# Altium PCB EB2_Cyclone_1_03.PcbDoc (part 3 of 4)
Units mm, origin at the board's own origin, x right, y up, seen from the top; angles counter-clockwise.
Board outline 165.1 x 115.01 mm, 6 copper layers (Top Layer, MidLayer1, VCC Plane, GND Plane, MidLayer2, Bottom Layer); 336 components, 379 nets, 1581 pads, 731 vias.
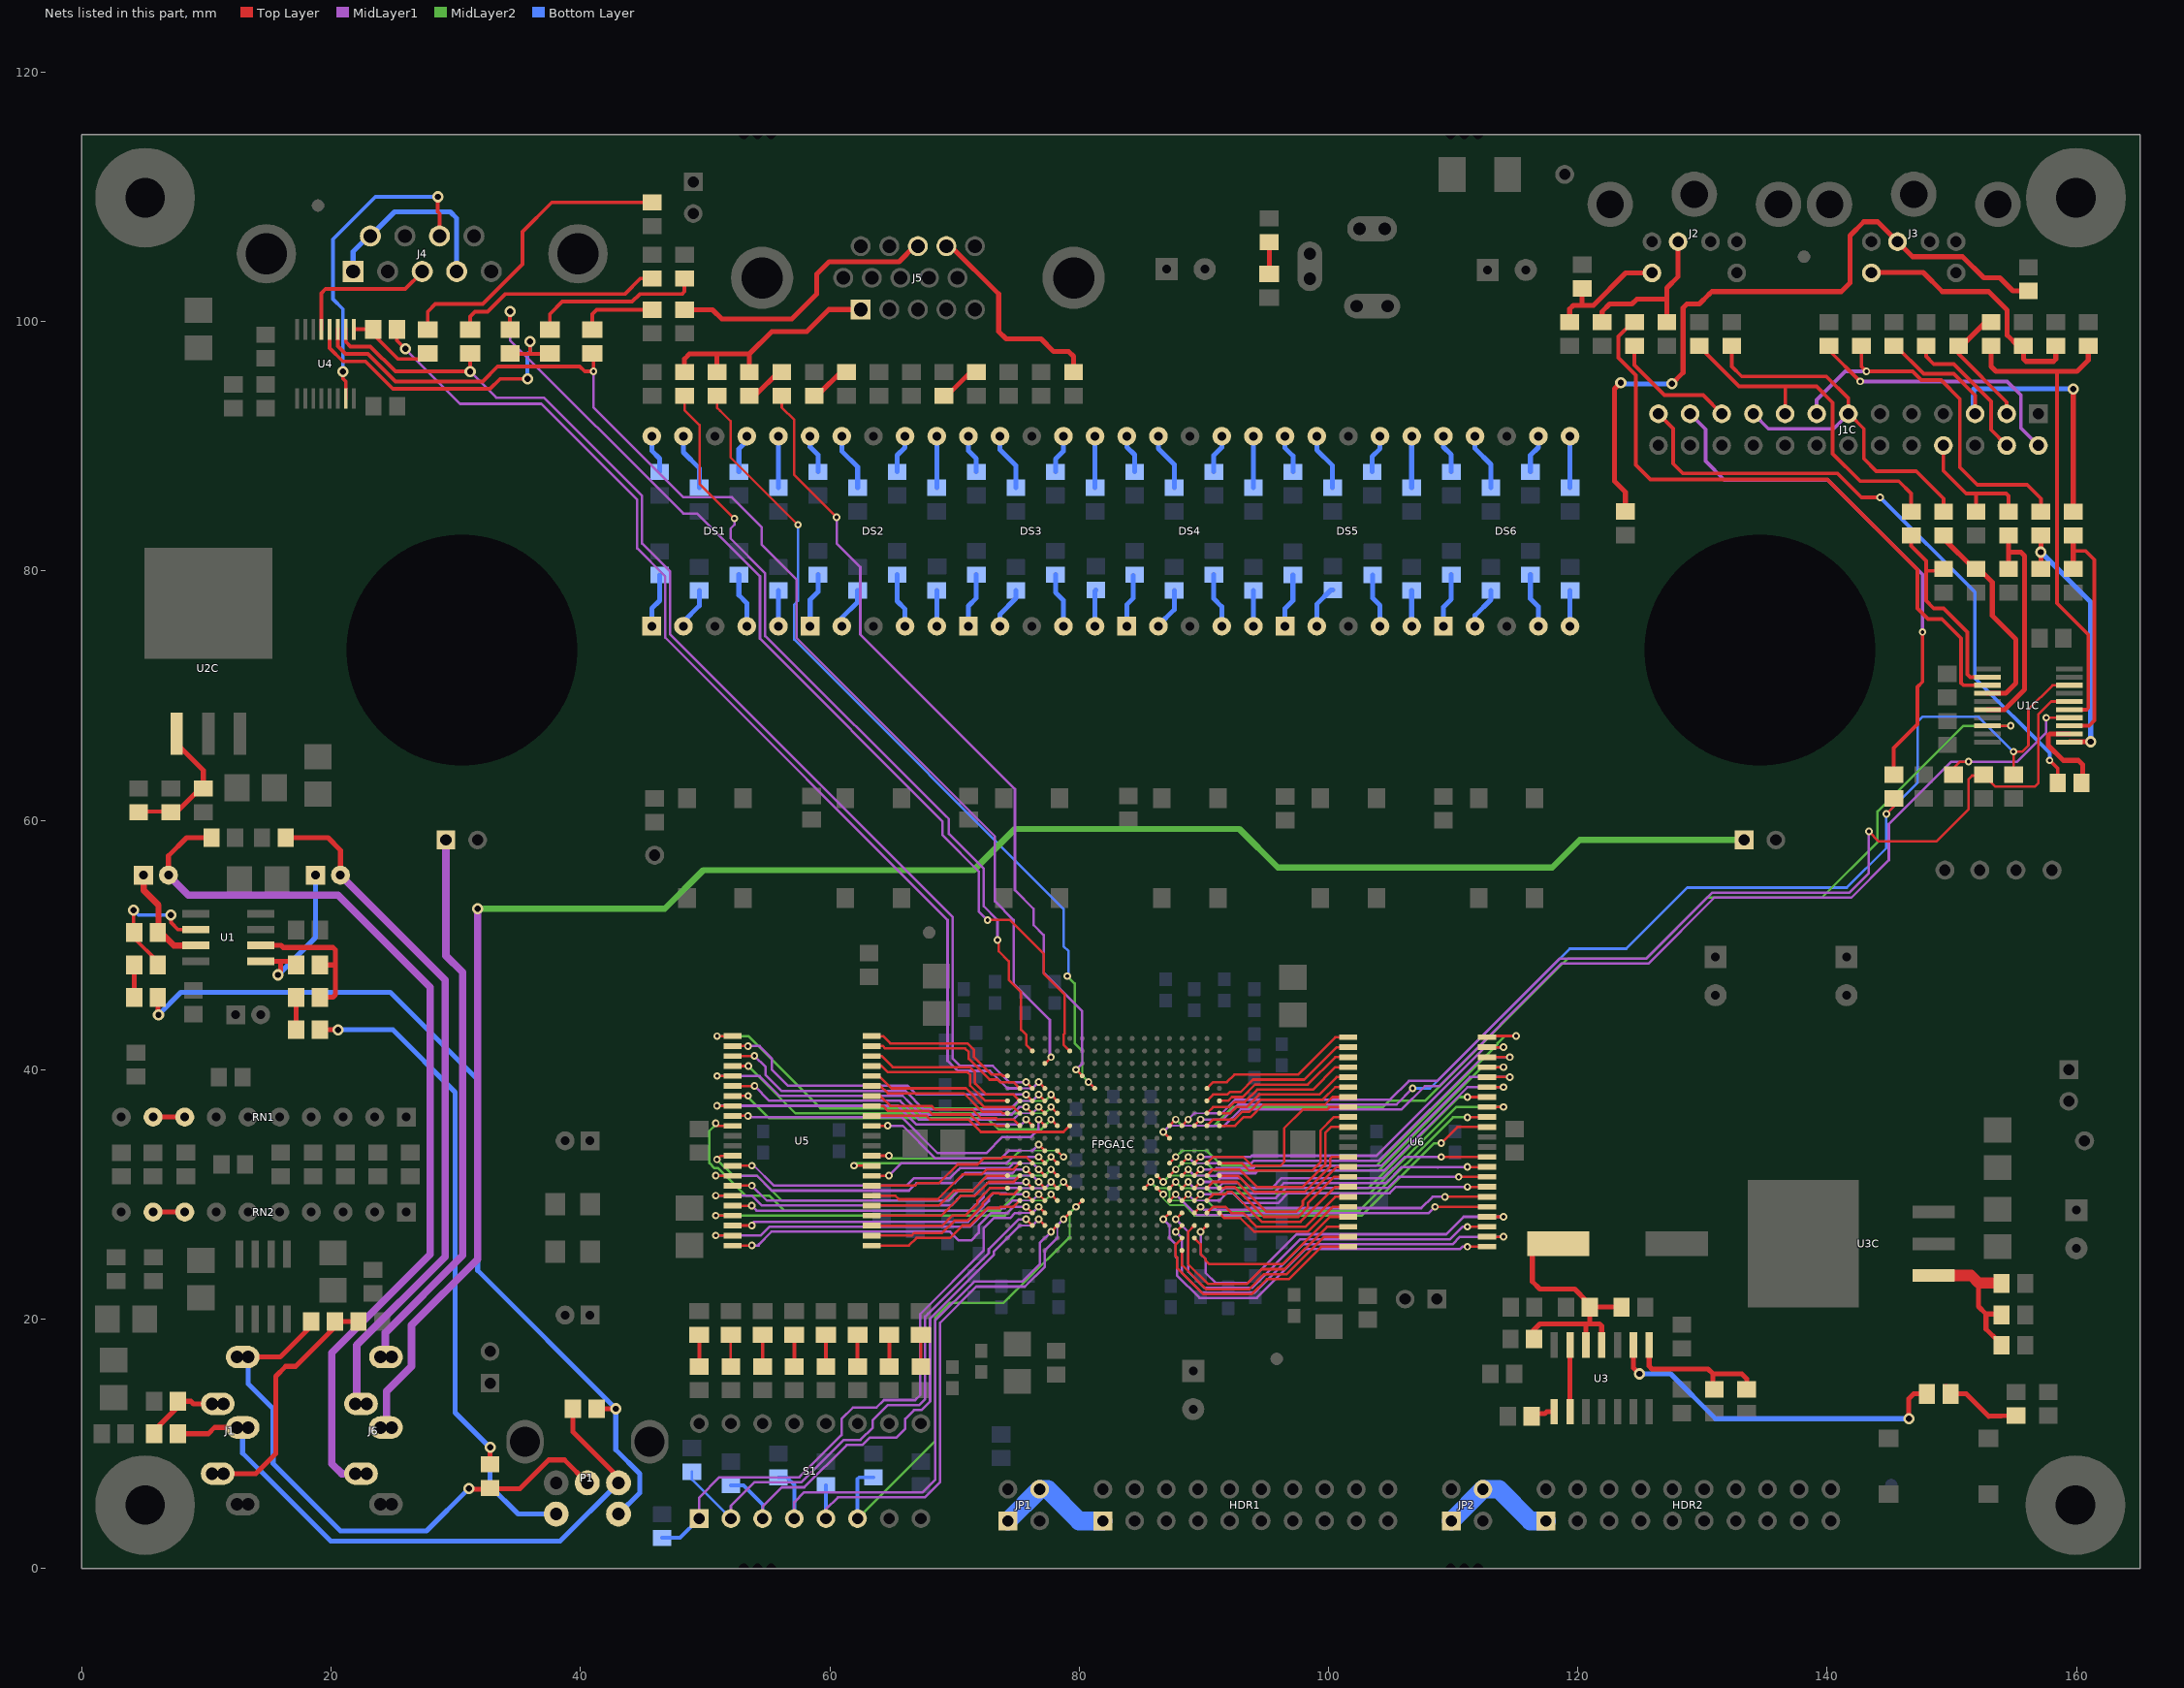
[diagram p7: the nets of this part, all layers, seen from the top]

## Via types
v1: diameter 0.6, hole 0.3, Top Layer to Bottom Layer, tented both sides, 433 vias
v2: diameter 1.6, hole 1, Top Layer to Bottom Layer, 191 vias
v3: diameter 0.9, hole 0.5, Top Layer to Bottom Layer, tented both sides, 105 vias
v4: diameter 1.27, hole 0.7, Top Layer to Bottom Layer, tented both sides, 2 vias

## Nets (pads, with @x,y where several pads share a name; then routed paths per layer and width w, separated by ;. In a path a pad name is that pad's centre, name@x,y a point inside that pad or via, vN(x,y) a via of type N, cw(c..) or ccw(c..) an arc to the next point about the centre after c; other vN are vias at no path point) (continued)
NetC32_2: C32.2 CR1.1 L1.1 R112.1 U3.4 U3.5 | length 23.5
  Top Layer w0.4: L1.1@116.42,18.6 116.42,19.07 116.95,19.6 120.55,19.6 ; CR1.1@118.35,26 116.35,26 116.35,23 116.95,22.4 119.75,22.4 C32.2@120.75,21.4 ; U3.5@120.65,17.915 120.65,19.5 120.55,19.6 ; C32.2@120.95,21 120.95,20.955 120.95,19.6 ; C32.2@120.965,20.955 R112.1@123.51,20.955 ; U3.4@121.92,17.915 121.92,19.43 121.75,19.6 120.95,19.6 ; 120.55,19.6 120.95,19.6
NetC33_1: C33.1 P1.2 R115.2 | length 53.3
  Top Layer w0.4: C33.1@19.1,43.2 v3(20.55,43.2) ; R115.2@32.75,8.3 R115.2@32.75,8.35 v3(32.75,9.7)
  Bottom Layer w0.4: v3(20.55,43.2) 24.95,43.2 29.95,38.2 29.95,12.5 v3(32.75,9.7) 32.75,6.6 34.99,4.36 P1.2@38.05,4.36
NetC33_2: C33.2 R116.1 | length 2.6
  Top Layer w0.4: C33.2@17.2,43.2 R116.1@17.2,45.8
NetC35_1: C35.1 P1.5 R114.2 | length 73.1
  Top Layer w0.4: C35.1@6.1,45.8 6.1,44.45 v3(6.15,44.4) ; R114.2@41.3,12.8 v3(42.85,12.8)
  Bottom Layer w0.4: v3(6.15,44.4) 7.95,46.2 24.75,46.2 31.75,39.2 31.75,23.9 42.84,12.81 42.84,12.8 42.84,9.51 44.75,7.6 44.75,6.06 P1.5@43.05,4.36
NetC35_2: C35.2 R117.1 | length 2.6
  Top Layer w0.4: C35.2@4.2,45.8 R117.1@4.2,48.4
NetC36_1: C36.1 R118.2 U1.1 | length 13.5
  Top Layer w0.4: U1.1@14.35,48.695 15.95,48.695 ; v3(15.75,47.6) 15.95,47.8 15.95,48.695 ; R118.2@17.35,48.6 17.255,48.695 17.2,48.695 15.95,48.695
  Bottom Layer w0.4: v3(15.75,47.6) 18.75,50.6 C36.1@18.75,55.6
NetC36_2: C36.2 J6.4 J6.4A J6.4B R120.2 | length 56.7
  Top Layer w0.4: R120.2@16.35,58.6 19.75,58.6 20.75,57.6 C36.2@20.75,55.6
  MidLayer1 w0.6: C36.2@20.75,55.6 29.15,47.2 29.15,25 22.05,17.9 22.05,13.3 J6.4@22.15,13.2 ; J6.4B@21.95,13.2 J6.4@22.15,13.2 ; J6.4@22.75,13.3 J6.4@22.65,13.2 ; J6.4A@22.85,13.2 J6.4@22.65,13.2 ; J6.4@22.15,13.2 J6.4@22.4,13.2 J6.4@22.65,13.2
NetC38_1: C38.1 R119.2 U1.7 | length 8.4
  Top Layer w0.5: C38.1@4.95,55.6 4.95,54.4 6.15,53.2 6.15,51.2 6.225,51.125 7.385,49.965 U1.7@9.15,49.965
NetC38_2: C38.2 J6.2 J6.2A J6.2B R121.2 | length 74.9
  Top Layer w0.4: C38.2@6.95,55.6 6.95,57.15 8.4,58.6 R121.2@10.4,58.6
  MidLayer1 w0.6: C38.2@6.95,55.6 8.55,54 20.55,54 27.95,46.6 27.95,25.2 20.05,17.3 20.05,8.4 20.85,7.6 J6.2B@21.95,7.6 J6.2@22.4,7.6 J6.2A@22.85,7.6
NetDS1_1: DS1.1 R41.1 | length 4.4
  Bottom Layer w0.4: DS1.1@45.72,75.565 45.72,76.99 46.35,77.62 R41.1@46.35,79.67
NetDS1_2: DS1.2 R37.1 | length 3.4
  Bottom Layer w0.4: DS1.2@48.26,75.565 48.26,75.93 49.53,77.2 R37.1@49.53,78.425
NetDS1_4: DS1.4 R33.1 | length 4.4
  Bottom Layer w0.4: R33.1@52.705,79.695 52.705,78.065 53.34,77.43 DS1.4@53.34,75.565
NetDS1_5: DS1.5 R53.1 | length 2.9
  Bottom Layer w0.4: DS1.5@55.88,75.565 R53.1@55.88,78.425
NetDS1_6: DS1.6 R29.1 | length 4.1
  Bottom Layer w0.4: R29.1@55.88,86.675 DS1.6@55.88,90.805
NetDS1_7: DS1.7 R25.1 | length 3.1
  Bottom Layer w0.4: R25.1@52.705,87.945 52.705,89.775 53.34,90.41 DS1.7@53.34,90.805
NetDS1_9: DS1.9 R45.1 | length 4.7
  Bottom Layer w0.4: DS1.9@48.26,90.805 48.26,89.51 49.53,88.24 R45.1@49.53,86.675
NetDS1_10: DS1.10 R49.1 | length 3.1
  Bottom Layer w0.4: DS1.10@45.72,90.805 45.72,89.65 46.355,89.015 R49.1@46.355,87.945
NetDS2_1: DS2.1 R42.1 | length 4.4
  Bottom Layer w0.4: DS2.1@58.42,75.565 58.42,77.69 59.055,78.325 R42.1@59.055,79.695
NetDS2_2: DS2.2 R38.1 | length 3.4
  Bottom Layer w0.4: DS2.2@60.96,75.565 60.96,76.23 62.23,77.5 R38.1@62.23,78.425
NetDS2_4: DS2.4 R34.1 | length 4.4
  Bottom Layer w0.4: R34.1@65.405,79.695 65.405,77.565 66.04,76.93 DS2.4@66.04,75.565
NetDS2_5: DS2.5 R54.1 | length 2.9
  Bottom Layer w0.4: DS2.5@68.58,75.565 R54.1@68.58,78.425
NetDS2_6: DS2.6 R30.1 | length 4.1
  Bottom Layer w0.4: R30.1@68.58,86.675 DS2.6@68.58,90.805
NetDS2_7: DS2.7 R26.1 | length 3.1
  Bottom Layer w0.4: R26.1@65.405,87.945 65.405,89.275 66.04,89.91 DS2.7@66.04,90.805
NetDS2_9: DS2.9 R46.1 | length 4.7
  Bottom Layer w0.4: DS2.9@60.96,90.805 60.96,89.61 62.23,88.34 R46.1@62.23,86.675
NetDS2_10: DS2.10 R50.1 | length 3.1
  Bottom Layer w0.4: DS2.10@58.42,90.805 58.42,89.95 59.055,89.315 R50.1@59.055,87.945
NetDS3_1: DS3.1 R43.1 | length 4.4
  Bottom Layer w0.4: DS3.1@71.12,75.565 71.12,77.19 71.755,77.825 R43.1@71.755,79.695
NetDS3_2: DS3.2 R39.1 | length 3.4
  Bottom Layer w0.4: DS3.2@73.66,75.565 73.66,76.53 74.93,77.8 R39.1@74.93,78.425
NetDS3_4: DS3.4 R35.1 | length 4.4
  Bottom Layer w0.4: R35.1@78.105,79.695 78.105,78.265 78.74,77.63 DS3.4@78.74,75.565
NetDS3_5: DS3.5 R55.1 | length 2.9
  Bottom Layer w0.4: DS3.5@81.28,75.565 81.28,78.4 R55.1@81.35,78.47
NetDS3_6: DS3.6 R31.1 | length 4.1
  Bottom Layer w0.4: R31.1@81.28,86.675 DS3.6@81.28,90.805
NetDS3_7: DS3.7 R27.1 | length 3.1
  Bottom Layer w0.4: R27.1@78.105,87.945 78.105,88.975 78.74,89.61 DS3.7@78.74,90.805
NetDS3_9: DS3.9 R47.1 | length 4.7
  Bottom Layer w0.4: DS3.9@73.66,90.805 73.66,89.71 74.93,88.44 R47.1@74.93,86.675
NetDS3_10: DS3.10 R51.1 | length 3.1
  Bottom Layer w0.4: DS3.10@71.12,90.805 71.12,89.65 71.755,89.015 R51.1@71.755,87.945
NetDS4_1: DS4.1 R44.1 | length 4.3
  Bottom Layer w0.4: DS4.1@83.82,75.565 83.82,77.29 84.35,77.82 R44.1@84.35,79.62
NetDS4_2: DS4.2 R40.1 | length 3.4
  Bottom Layer w0.4: DS4.2@86.36,75.565 86.36,75.63 87.63,76.9 R40.1@87.63,78.425
NetDS4_4: DS4.4 R36.1 | length 4.4
  Bottom Layer w0.4: R36.1@90.805,79.695 90.805,77.765 91.44,77.13 DS4.4@91.44,75.565
NetDS4_5: DS4.5 R56.1 | length 2.9
  Bottom Layer w0.4: DS4.5@93.98,75.565 R56.1@93.98,78.425
NetDS4_6: DS4.6 R32.1 | length 4.1
  Bottom Layer w0.4: R32.1@93.98,86.675 DS4.6@93.98,90.805
NetDS4_7: DS4.7 R28.1 | length 3.1
  Bottom Layer w0.4: R28.1@90.805,87.945 90.805,89.275 91.44,89.91 DS4.7@91.44,90.805
NetDS4_9: DS4.9 R48.1 | length 4.7
  Bottom Layer w0.4: DS4.9@86.36,90.805 86.36,89.81 87.63,88.54 R48.1@87.63,86.675
NetDS4_10: DS4.10 R52.1 | length 3.1
  Bottom Layer w0.4: DS4.10@83.82,90.805 83.82,89.95 84.455,89.315 R52.1@84.455,87.945
NetDS5_1: DS5.1 R65.1 | length 4.4
  Bottom Layer w0.4: DS5.1@96.52,75.565 96.52,76.99 97.15,77.62 R65.1@97.15,79.67
NetDS5_2: DS5.2 R63.1 | length 3.5
  Bottom Layer w0.4: DS5.2@99.06,75.565 99.06,77.33 100.2,78.47 R63.1@100.35,78.47
NetDS5_4: DS5.4 R61.1 | length 4.4
  Bottom Layer w0.4: R61.1@103.54,79.675 103.54,77.83 104.14,77.23 DS5.4@104.14,75.565
NetDS5_5: DS5.5 R71.1 | length 2.9
  Bottom Layer w0.4: DS5.5@106.68,75.565 R71.1@106.68,78.425
NetDS5_6: DS5.6 R59.1 | length 4.1
  Bottom Layer w0.4: R59.1@106.68,86.675 DS5.6@106.68,90.805
NetDS5_7: DS5.7 R57.1 | length 3.1
  Bottom Layer w0.4: R57.1@103.505,87.945 103.505,89.175 104.14,89.81 DS5.7@104.14,90.805
NetDS5_9: DS5.9 R67.1 | length 4.7
  Bottom Layer w0.4: DS5.9@99.06,90.805 99.06,89.71 100.33,88.44 R67.1@100.33,86.675
NetDS5_10: DS5.10 R69.1 | length 3.1
  Bottom Layer w0.4: DS5.10@96.52,90.805 96.52,89.85 97.155,89.215 R69.1@97.155,87.945
NetDS6_1: DS6.1 R66.1 | length 4.4
  Bottom Layer w0.4: DS6.1@109.22,75.565 109.22,77.09 109.855,77.725 R66.1@109.855,79.695
NetDS6_2: DS6.2 R64.1 | length 3.4
  Bottom Layer w0.4: DS6.2@111.76,75.565 111.76,76.43 113.03,77.7 R64.1@113.03,78.425
NetDS6_4: DS6.4 R62.1 | length 4.4
  Bottom Layer w0.4: R62.1@116.205,79.695 116.205,77.765 116.84,77.13 DS6.4@116.84,75.565
NetDS6_5: DS6.5 R72.1 | length 2.9
  Bottom Layer w0.4: DS6.5@119.38,75.565 R72.1@119.38,78.425
NetDS6_6: DS6.6 R60.1 | length 4.1
  Bottom Layer w0.4: R60.1@119.38,86.675 DS6.6@119.38,90.805
NetDS6_7: DS6.7 R58.1 | length 3.1
  Bottom Layer w0.4: R58.1@116.205,87.945 116.205,89.275 116.84,89.91 DS6.7@116.84,90.805
NetDS6_9: DS6.9 R68.1 | length 4.7
  Bottom Layer w0.4: DS6.9@111.76,90.805 111.76,89.81 113.03,88.54 R68.1@113.03,86.675
NetDS6_10: DS6.10 R70.1 | length 3.1
  Bottom Layer w0.4: DS6.10@109.22,90.805 109.22,89.95 109.855,89.315 R70.1@109.855,87.945
NetJ1_2: J1.2 J1.2A J1.2B R3.2 R113.1 | length 19.8
  Top Layer w0.4: J1.2A@11.35,7.6 13.95,7.6 15.55,9.2 15.55,15.4 16.35,16.2 17.15,16.2 20.3,19.35 R113.1@20.3,19.8 R3.2@22.2,19.8
NetJ1_4: J1.4 J1.4A J1.4B R1.1 R2.2 | length 6.7
  Top Layer w0.4: R1.1@5.95,11.2 7.7,12.95 R2.2@7.7,13.4 8.75,13.4 8.95,13.2 J1.4B@10.45,13.2 J1.4@10.9,13.2 J1.4A@11.35,13.2
NetJ1C_2: J1C.2 R11C.2 R25C.2 | length 10
  Top Layer w0.3: R11C.2@150.55,98.05 150.55,97.4 154.41,93.54 J1C.2@154.41,92.6
  Top Layer w0.4: R11C.2@150.495,98.05 150.495,98.11 150.55,98.11 150.86,98.11 R25C.2@152.65,99.9
NetJ1C_3: J1C.3 R12C.2 R24C.2 | length 30
  Top Layer w0.3: R12C.2@145.35,98.05 145.5,98.05 147.75,95.8 150.15,95.8 151.87,94.08 J1C.3@151.87,92.6
  Top Layer w0.4: R12C.2@145.322,98.036 145.215,98.25 145.4,98.121 R12C.2@145.415,98.11 ; R24C.2@159.75,84.75 v3(159.75,94.6)
  Bottom Layer w0.4: J1C.3@151.67,92.6 151.67,92.608 151.75,94.6 v3(159.75,94.6)
NetJ1C_7: J1C.7 J1C.10 R14C.2 R22C.2 | length 35
  Top Layer w0.3: R14C.2@132.35,98.05 132.35,96.4 133.15,95.6 139.95,95.6 141.71,93.84 J1C.7@141.71,92.6 141.75,92.6 142.95,91.4 142.95,89 143.95,88 147.15,88 149.35,85.8 R22C.2@149.35,84.75
  Top Layer w0.4: R22C.2@149.35,84.6 R22C.2@149.35,84.75
  MidLayer1 w0.3: J1C.10@134.09,92.6 135.29,91.4 140.51,91.4 J1C.7@141.71,92.6
NetJ1C_8: J1C.8 R13C.2 R23C.2 | length 30.8
  Top Layer w0.3: J1C.8@139.17,92.52 J1C.8@139.17,92.6 ; R13C.2@142.75,98.05 142.75,96.4 v1(143.15,96) 146.843,96 147.543,95.3 149.15,95.3 150.65,93.8 150.65,88.3 152.05,86.9 156.05,86.9 157.15,85.8 R23C.2@157.15,84.75
  MidLayer1 w0.3: J1C.8@139.17,92.6 139.17,93.72 141.45,96 v1(143.15,96)
NetJ1C_9: J1C.9 R15C.2 R21C.2 | length 28.1
  Top Layer w0.3: R15C.2@129.75,98.05 129.75,98 132.95,94.8 136.65,94.8 ; J1C.9@136.63,92.6 136.63,92.62 136.65,92.64 136.65,94.8 ; R21C.2@146.75,84.75 146.75,86.2 145.75,87.2 142.65,87.2 140.45,89.4 140.45,93.5 139.15,94.8 136.65,94.8
  Top Layer w0.4: R15C.2@129.75,98.05 R15C.2@129.75,98.2
NetJ1C_11: J1C.11 R19C.2 | length 10.2
  Top Layer w0.3: R19C.2@124.55,98.05 124.55,96.507 126.957,94.1 130.05,94.1 J1C.11@131.55,92.6
NetJ1C_12: J1C.12 R18C.1 | length 42.5
  Top Layer w0.3: R18C.1@145.353,63.65 145.353,65.803 147.25,67.7 147.25,70.7 147.65,71.1 v1(147.65,75.1)
  MidLayer1 w0.3: J1C.12@129.01,92.6 130.25,91.36 130.25,88.8 131.75,87.3 140.05,87.3 147.65,79.7 v1(147.65,75.1)
NetJ1C_13: J1C.13 R20C.2 | length 50.8
  Top Layer w0.3: J1C.13@126.47,92.6 127.65,91.42 127.65,88.6 128.427,87.823 140.827,87.823 142.75,85.9 v1(144.25,85.9) ; v1(157.85,64.8) 158.5,64.15 R20C.2@158.5,63.2
  Bottom Layer w0.3: v1(144.25,85.9) 151.85,78.3 151.85,71.4 157.85,65.4 v1(157.85,64.8)
NetJ1C_14: J1C.14 R16C.2 | length 22.2
  Top Layer w0.2: R16C.2@139.8,98.05 R16C.2@140.15,98.05
  Top Layer w0.3: R16C.2@140.15,98.05 140.15,97.7 v1(142.65,95.2)
  MidLayer1 w0.3: v1(142.65,95.2) 154.45,95.2 155.55,94.1 155.55,91.46 J1C.14@156.95,90.06
NetJ1C_15: J1C.15 R17C.2 | length 12.1
  Top Layer w0.3: R17C.2@147.95,98.05 147.95,97.2 148.55,96.6 150.15,96.6 153.15,93.6 153.15,91.32 J1C.15@154.41,90.06
  Top Layer w0.4: R17C.2@147.874,98.012 147.755,98.25 R17C.2@147.955,98.11
NetJ1C_17: J1C.17 R10C.2 R26C.2 | length 10.8
  Top Layer w0.3: J1C.17@149.33,90.06 149.33,88.02 151.15,86.2 151.95,86.2 ; R10C.2@151.95,84.75 151.95,86.2 ; R26C.2@154.55,84.75 154.55,86 154.35,86.2 151.95,86.2
NetJ2_1: J2.1 R87.2 R88.2 | length 13.3
  Top Layer w0.4: R88.2@121.95,99.95 121.95,100.8 122.55,101.4 124.35,101.4 124.75,101.8 127.15,101.8 ; R87.2@127.15,99.95 127.15,101.8 ; J2.1@128.05,106.4 128.05,103.6 127.15,102.7 127.15,101.8
NetJ2_6: J2.6 R86.2 R89.2 | length 10.2
  Top Layer w0.4: R89.2@119.35,99.95 119.35,101 119.65,101.3 120.35,101.3 ; R86.2@120.35,102.65 120.35,101.3 ; J2.6@125.95,103.9 123.85,103.9 121.25,101.3 120.35,101.3
NetJ3_1: J3.1 R85.2 R92.2 | length 57.5
  Top Layer w0.4: v3(123.45,95.1) 122.95,94.6 122.95,87.2 123.825,86.325 R92.2@123.825,84.77 ; v3(127.55,95) 128.45,95.9 128.45,101.1 128.75,101.4 129.75,101.4 130.55,102.2 130.75,102.4 141.15,102.4 141.85,103.1 141.85,106.9 142.95,108 144.05,108 145.4,106.65 145.694,106.575 146.07,106.48 146.07,106.435 145.65,106.435 145.615,106.435 J3.1@145.65,106.4 146.85,105.2 150.87,105.2 152.57,103.5 153.85,103.5 154.9,102.45 R85.2@156.15,102.45
  Bottom Layer w0.4: v3(123.45,95.1) 123.55,95 v3(127.55,95)
NetJ3_6: J3.6 R84.2 R93.2 | length 20.2
  Top Layer w0.4: J3.6@144.07,103.935 147.715,103.935 149.25,102.4 152.95,102.4 154.45,100.9 154.45,98.9 155.3,98.05 R84.2@155.75,98.05 155.75,97 155.95,96.8 158.15,96.8 158.35,97 R93.2@158.35,98.05
NetJ4_1: J4.1 J4.4 J4.6 | length 15.7
  Bottom Layer w0.4: J4.1@21.765,104.015 21.765,105.615 23.005,106.855 J4.6@23.15,106.855 25.095,108.8 29.55,108.8 30.075,108.275 J4.4@30.075,104.015
NetJ5_13: J5.13 R94.2 | length 22.4
  Top Layer w0.4: R94.2@48.35,100.95 50.6,100.95 51.35,100.2 56.95,100.2 58.95,102.2 58.95,103.8 59.95,104.8 65.55,104.8 66.836,106.086 67.064,106.086 J5.13@67.064,106.045
NetJ5_14: J5.14 R95.2 | length 16.9
  Top Layer w0.4: J5.14@69.354,106.045 69.705,106.045 73.55,102.2 73.55,99.2 74.15,98.6 76.95,98.6 77.95,97.6 79.15,97.6 79.55,97.2 R95.2@79.55,95.95
NetLD0_2: LD0.2 R74.2 | length 2.5
  Top Layer w0.3: R74.2@49.53,16.19 LD0.2@49.53,18.735
NetLD1_2: LD1.2 R75.2 | length 2.6
  Top Layer w0.2: R75.2@52.05,16.1 52.05,16.19 LD1.2@52.05,18.7
NetLD2_2: LD2.2 R76.2 | length 2.5
  Top Layer w0.3: R76.2@54.61,16.19 LD2.2@54.61,18.735
NetLD3_2: LD3.2 R77.2 | length 2.5
  Top Layer w0.3: R77.2@57.15,16.19 LD3.2@57.15,18.735
NetLD4_2: LD4.2 R78.2 | length 2.5
  Top Layer w0.3: R78.2@59.69,16.19 LD4.2@59.69,18.735
NetLD5_2: LD5.2 R79.2 | length 2.5
  Top Layer w0.3: R79.2@62.23,16.19 LD5.2@62.23,18.735
NetLD6_2: LD6.2 R80.2 | length 2.5
  Top Layer w0.3: R80.2@64.77,16.19 LD6.2@64.77,18.735
NetLD7_2: LD7.2 R81.2 | length 2.5
  Top Layer w0.2: R81.2@67.31,16.19 LD7.2@67.31,18.735
NetLED1_2: LED1.2 R83.2 | length 2.5
  Top Layer w0.4: LED1.2@95.25,103.82 R83.2@95.25,106.365
NetLED2_1: LED2.1 R73.1 | length 6.7
  Top Layer w0.4: LED2.1@149.55,14.6 LED2.1@150.025,14.125 ; LED2.1@149.9,14 151.15,14 152.95,12.2 R73.1@155.15,12.25
NetLED2_2: LED2.2 U3.2 | length 28.8
  Top Layer w0.4: U3.2@124.46,17.915 124.46,16.09 v3(124.95,15.6) ; v3(146.55,12) 146.55,13.6 146.95,14 LED2.2@148,14
  Bottom Layer w0.4: v3(124.95,15.6) 127.45,15.6 131.05,12 v3(146.55,12)
NetLED4_1: LED4.1 R96.1 | length 6.2
  Top Layer w0.3: LED4.1@40.95,99.35 40.95,100.6 41.3,100.95 R96.1@45.75,100.95
NetLED5_1: LED5.1 R97.1 | length 16.9
  Top Layer w0.3: LED5.1@31.15,99.35 31.15,100.4 31.55,100.8 32.55,100.8 33.95,102.2 43.55,102.2 44.8,103.45 R97.1@45.75,103.45
NetLED6_1: LED6.1 R98.1 | length 13.8
  Top Layer w0.3: LED6.1@37.55,99.35 37.55,100.6 38.55,101.6 44.15,101.6 44.75,102.2 48.15,102.2 48.35,102.4 R98.1@48.35,103.45
NetLED6_2: LED6.2 R90.2 U4.12 | length 25.7
  Top Layer w0.3: U4.12@19.875,99.375 19.875,97.875 20.95,96.8 22.75,96.8 24.95,94.6 32.75,94.6 33.55,95.4 v3(35.75,95.4) ; R90.2@34.75,97.4 35.95,97.4 ; v3(35.95,98.4) 35.95,97.4 ; LED6.2@37.35,97.4 35.95,97.4
  Bottom Layer w0.3: v3(35.75,95.4) 35.75,97.4 35.95,97.6 v3(35.95,98.4)
NetLED7_1: LED7.1 R99.1 | length 24.6
  Top Layer w0.3: LED7.1@27.75,99.35 27.75,100.8 28.35,101.4 32.15,101.4 35.35,104.6 35.35,107.2 37.7,109.55 R99.1@45.75,109.55
NetLED7_2: LED7.2 R91.2 U4.9 | length 7.3
  Top Layer w0.3: U4.9@21.825,99.375 R91.2@23.375,99.375 23.375,98.975 25.35,97 27.75,97 LED7.2@27.95,97
NetR24_2: R24.2 R82.2 U3.1 | length 11.8
  Top Layer w0.4: U3.1@125.73,17.915 125.73,16.22 125.95,16 130.45,16 130.85,15.6 ; R82.2@130.85,14.6 130.85,15.6 ; R24.2@133.55,14.35 133.55,15.2 133.15,15.6 130.85,15.6
NetR28C_1: R28C.1 R29C.2 R30C.2 U2C.1 | length 10.7
  Top Layer w0.3: R29C.2@4.55,60.7 7.15,60.7 R30C.2@7.275,60.825
  Top Layer w0.4: R30C.2@7.375,60.425 R28C.1@9.25,62.3 ; U2C.1@7.61,66.95 7.61,66.14 9.75,64 9.75,63.15 R28C.1@9.75,62.55
NetR31C_1: R31C.1 R32C.2 R33C.1 U3C.1 | length 11.7
  Top Layer w0.4: 152.15,22.9 152.15,21 152.75,20.4 ; R33C.1@153.75,18.2 152.75,19.2 152.75,20.4 ; R32C.2@153.99,20.32 153.91,20.4 152.75,20.4
  Top Layer w0.9: U3C.1@149.225,23.495 151.555,23.495 152.15,22.9 153.95,22.9 R31C.1@153.99,22.86
NetR100_2: R100.2 R101.1 | length 3.2
  Top Layer w0.3: R101.1@53.55,94.05 R101.1@54,94.05
  Top Layer w0.4: R101.1@54,94.05 R100.2@55.95,96
NetR103_2: R103.2 R104.1 | length 3.3
  Top Layer w0.4: R104.1@58.75,94.05 59,94.05 61.125,96.175 R103.2@61.15,96.2
NetR106_2: R106.2 R107.1 | length 3.6
  Top Layer w0.4: R107.1@68.95,94 69.15,94 69.35,94 71.3,95.95 R106.2@71.75,95.95
NetR116_2: R116.2 R118.1 U1.2 | length 12.3
  Top Layer w0.4: U1.2@14.35,49.965 15.985,49.965 16.15,49.8 20.15,49.8 20.35,49.6 20.35,48.4 ; R116.2@19.1,45.8 20.15,45.8 20.35,46 20.35,48.4 ; R118.1@19.1,48.4 20.35,48.4
NetR117_2: R117.2 R119.1 U1.6 | length 11
  Top Layer w0.3: v3(4.15,52.8) 4.15,51 4.15,50.6 R117.2@6.15,48.6 ; v3(7.15,52.4) 7.15,51.8 7.715,51.235 U1.6@9.15,51.235
  Bottom Layer w0.3: v3(4.15,52.8) 4.55,52.4 v3(7.15,52.4)
NetR122_2: R122.2 U3.8 | length 1.9
  Top Layer w0.4: R122.2@116.3,12.4 117.35,12.4 117.515,12.565 U3.8@118.11,12.565
NetRN1_8: RN1.8 RN1.9 | length 2.5
  Top Layer w0.4: RN1.9@5.715,36.195 RN1.8@8.255,36.195
NetRN2_8: RN2.8 RN2.9 | length 2.5
  Top Layer w0.4: RN2.9@5.715,28.575 RN2.8@8.255,28.575
NetU3_6: U3.6 U3.9 | length 5.4
  Top Layer w0.4: U3.9@119.38,12.565 U3.6@119.38,17.915
POT_IN_L: J1.5 J1.5A J1.5B P1.1 R113.2 R115.1 | length 46.4
  Top Layer w0.4: J1.5A@13.35,16.95 15.9,16.95 18.35,19.4 R113.2@18.35,19.8 ; v3(31.05,6.4) 31.1,6.35 32.75,6.35 32.8,6.4 35.15,6.4 37.45,8.7 38.71,8.7 P1.1@40.55,6.86
  Bottom Layer w0.4: J1.5A@13.35,16.95 13.35,14.8 15.35,12.8 15.35,8.4 20.75,3 27.65,3 v3(31.05,6.4)
POT_IN_R: J1.3 J1.3A J1.3B P1.4 R1.2 R114.1 | length 49.9
  Top Layer w0.4: R1.2@7.7,10.8 10.15,10.8 10.65,11.3 J1.3B@12.45,11.3 J1.3@12.9,11.3 ; R114.1@39.4,12.8 39.4,10.95 43.05,7.3 P1.4@43.05,6.86
  Bottom Layer w0.4: J1.3@12.9,11.3 12.9,9.25 15.241,6.909 19.95,2.2 38.39,2.2 P1.4@43.05,6.86
PP_HARD_TCK: C56C.1 R25C.1 U1C.15 | length 40.8
  Top Layer w0.3: 158.45,96 158.45,77.4 160.95,74.9 160.95,69 160.825,68.875 U1C.15@159.425,68.875
  Top Layer w0.4: R25C.1@153.15,98.05 153.15,96.4 153.55,96 158.45,96 160.05,96 160.95,96.9 C56C.1@160.95,98.05
PP_HARD_TDI: C58C.1 R23C.1 U1C.11 | length 21.2
  Top Layer w0.4: C58C.1@157.15,80.15 v3(157.15,81.5) R23C.1@157.15,82.8 ; U1C.11@159.425,66.275 159.45,66.3 v3(161.15,66.3)
  Bottom Layer w0.4: v3(157.15,81.5) 161.15,77.5 v3(161.15,66.3)
PP_HARD_TDO: R19C.1 U1C.3 | length 52.1
  Top Layer w0.3: R19C.1@124.55,99.95 124.4,99.95 123.25,98.8 123.25,97.1 124.65,95.7 124.65,88.5 125.827,87.323 140.027,87.323 147.25,80.1 147.25,77 148.113,76.137 149.213,76.137 150.75,74.6 150.75,71 150.925,70.825 U1C.3@152.875,70.825
PP_HARD_TMS: C57C.1 R24C.1 U1C.13 | length 19.7
  Top Layer w0.3: U1C.13@159.425,67.575 161.025,67.575 161.45,68 161.45,80.9 160.75,81.6 159.75,81.6
  Top Layer w0.4: C57C.1@159.75,80.15 159.75,81.6 R24C.1@159.75,82.8
PP_SOFT_TCK: C61C.1 R21C.1 U1C.2 | length 16.6
  Top Layer w0.3: R21C.1@146.75,82.85 146.75,82 147.95,80.8 147.95,80 ; C61C.1@148.95,80 147.95,80 ; U1C.2@152.875,71.475 151.475,71.475 151.25,71.7 151.25,75.1 149.35,77 148.55,77 147.95,77.6 147.95,80
  Top Layer w0.4: R21C.1@146.75,82.75 R21C.1@146.75,82.85 ; C61C.1@149.35,80.15 C61C.1@149.6,80.15
PP_SOFT_TDI: C60C.1 R22C.1 U1C.4 | length 17
  Top Layer w0.4: R22C.1@149.35,82.85 149.35,82.6 151.875,80.075 C60C.1@151.95,80 ; C60C.1@152.15,80.2 153.25,79.1 153.25,76.4 155.15,74.5 155.15,71 154.65,70.5 154.325,70.175 U1C.4@152.875,70.175
PP_SOFT_TDO: R20C.1 U1C.12 | length 7.2
  Top Layer w0.4: U1C.12@159.425,66.925 157.875,66.925 157.75,66.8 157.75,66 158.95,64.8 160.15,64.8 160.5,64.45 R20C.1@160.5,63.2
PP_SOFT_TMS: C55C.1 R26C.1 U1C.6 | length 18.5
  Top Layer w0.4: U1C.6@152.875,68.875 154.225,68.875 155.85,70.5 155.85,81.2 155.55,81.5 154.55,81.5 ; C55C.1@154.55,80.15 154.55,81.5 ; R26C.1@154.55,82.85 154.55,81.5
PWR_USER_1: HDR1.1 JP1.1 JP1.4 | length 9.7
  Top Layer w0.2: HDR1.1@81.915,3.81 HDR1.1@81.915,3.835
  Bottom Layer w1.5: JP1.1@74.295,3.81 JP1.4@76.835,6.35 77.47,6.35 80.01,3.81 HDR1.1@81.915,3.81
PWR_USER_2: HDR2.1 JP2.1 JP2.4 | length 9.7
  Bottom Layer w1.5: JP2.1@109.855,3.81 JP2.4@112.395,6.35 113.665,6.35 116.205,3.81 HDR2.1@117.44,3.81 HDR2.1@117.475,3.81
RED0: FPGA1C.D7 R100.1 | length 64.9
  Top Layer w0.2: R100.1@56.15,94.05 56.15,93.1 57.15,92.1 57.15,87.7 v1(60.55,84.3) ; v1(79.75,40) FPGA1C.D7@80.25,39.5
  MidLayer1 w0.14: 80.25,40.5 80.25,41.5
  MidLayer1 w0.2: v1(60.55,84.3) 60.55,82.2 62.45,80.3 62.45,74.9 74.85,62.5 74.85,54.4 76.35,52.9 76.35,51.6 77.15,50.8 77.15,47.8 80.25,44.7 80.25,41.5 ; v1(79.75,40) 80.25,40.5
RED1: FPGA1C.E8 R102.1 | length 68.4
  Top Layer w0.2: R102.1@50.95,94.05 50.95,93.1 51.216,92.834 52.05,92 52.05,89.1 v1(57.45,83.7) ; v1(80.75,39) FPGA1C.E8@81.25,38.5
  MidLayer2 w0.14: 80.25,39.5 80.25,41.5
  MidLayer2 w0.2: v1(79.05,47.5) 79.65,46.9 79.65,42.1 80.25,41.5 ; 80.25,39.5 v1(80.75,39)
  Bottom Layer w0.2: v1(57.45,83.7) 57.45,77.6 57.15,77.3 57.15,74.5 78.75,52.9 78.75,49.9 79.15,49.5 v1@79.15,47.5
RED2: FPGA1C.B3 R109.1 | length 64.4
  Top Layer w0.2: R109.1@48.35,94.05 48.35,92.9 49.55,91.7 49.55,87 v1(52.35,84.2) ; v1(73.45,50.4) 73.55,50.3 73.55,49.5 74.35,48.7 74.35,47.2 75.35,46.2 75.35,43.2 75.75,42.8 75.75,42 FPGA1C.B3@76.25,41.5
  MidLayer1 w0.2: v1(52.35,84.2) 52.35,83.7 52.05,83.4 52.05,82.6 54.825,79.775 54.825,74.775 69.246,60.395 ; 69.25,60.4 69.55,60.1 69.55,58.9 72.35,56.1 72.35,53.1 73.45,52 v1(73.45,50.4) ; 69.546,60.096 69.55,60.092
RED#: J5.1 R101.2 R102.2 R109.2 | length 19.7
  Top Layer w0.4: R109.2@48.35,95.95 48.35,97 48.75,97.4 50.95,97.4 ; R102.2@50.95,95.95 50.95,97.4 ; R101.2@53.55,95.95 53.55,97.4 ; J5.1@62.484,100.965 59.915,100.965 58.15,99.2 55.35,99.2 53.55,97.4 ; 50.95,97.4 53.55,97.4
RS232_CTS: FPGA1C.E4 R91.1 | length 89.9
  Top Layer w0.2: v1(76.75,39) FPGA1C.E4@77.25,38.5
  Top Layer w0.3: R91.1@25.275,99.375 25.275,98.475 v3(25.95,97.8)
  MidLayer1 w0.14: 75.25,38.5 76.25,38.5
  MidLayer1 w0.2: v3(25.95,97.8) 30.35,93.4 36.85,93.4 44.55,85.7 44.55,81.8 46.801,79.549 46.801,74.649 69.45,52 69.45,40.7 70.25,39.9 72.85,39.9 74.25,38.5 75.25,38.5 ; 76.25,38.5 v1(76.75,39)
RS232_RTS: FPGA1C.E3 LED5.2 U4.10 | length 94.4
  Top Layer w0.2: v1(75.75,39) FPGA1C.E3@76.25,38.5
  Top Layer w0.3: U4.10@21.175,99.375 21.175,98.375 21.55,98 23.15,98 25.15,96 v3(31.15,96) 31.15,96.2 LED5.2@31.15,97.45
  MidLayer1 w0.2: v3@31.15,95.8 v3(31.15,96) 33.25,93.9 37.05,93.9 44.95,86 44.95,82.2 47.201,79.949 47.201,74.9 69.85,52.251 69.85,40.9 70.45,40.3 73.083,40.3 74.383,39 v1(75.75,39)
RS232_RX: FPGA1C.B6 R90.1 | length 81.1
  Top Layer w0.2: v1(72.65,52) 74.45,52 77.15,49.3 77.15,47.7 78.85,46 78.85,42.9 78.75,42.8 78.75,42 FPGA1C.B6@79.25,41.5
  Top Layer w0.3: R90.1@34.35,99.35 v3(34.35,100.8)
  MidLayer1 w0.2: v3(34.35,100.8) 34.35,98.5 48.25,84.6 49.35,84.6 52.15,81.8 ; 52.152,81.802 54.399,79.576 54.399,74.576 69.052,59.902 ; 69.05,59.9 69.05,58.8 71.95,55.9 71.95,52.7 v1(72.65,52)
RS232_TX: FPGA1C.C4 LED4.2 U4.11 | length 99.4
  Top Layer w0.2: FPGA1C.C4@77.25,40.5 v1(77.75,41)
  Top Layer w0.3: U4.11@20.525,99.375 20.525,98.025 21.15,97.4 22.95,97.4 25.15,95.2 32.15,95.2 33.35,96.4 39.95,96.4 40.35,96 v1(41.05,96) 41.05,97.2 41.045,97.198 40.489,96.988 LED4.2@40.95,97.45
  MidLayer1 w0.2: v1(41.05,96) 41.05,93.1 48.25,85.9 52.15,85.9 54.55,83.5 54.55,82.1 57.35,79.3 57.35,74.6 73.25,58.7 73.25,53.5 74.75,52 74.75,46.9 77.65,44 77.65,41.1 v1(77.75,41)
RTS: J4.8 U4.7 | length 26.2
  Top Layer w0.3: v3(20.95,96) 20.95,95.425 21.175,95.2 U4.7@21.175,93.825 ; v3(28.55,110) 28.55,108.8 28.69,108.66 J4.8@28.69,106.855
  Bottom Layer w0.3: v3(20.95,96) 20.95,101 20.15,101.8 20.15,106.6 23.55,110 v3(28.55,110)
RX: J4.3 U4.13 | length 11.7
  Top Layer w0.3: U4.13@19.225,99.375 19.225,102.275 19.55,102.6 25.95,102.6 27.305,103.955 J4.3@27.305,104.015
SOFT_TCK: FPGA1C.H16 R5C.1 R18C.2 U1C.18 | length 96.6
  Top Layer w0.2: FPGA1C.H16@89.25,35.5 v1(89.75,36) ; v1(144.75,60.5) 145.353,61.103 R18C.2@145.353,61.75 ; R5C.1@154.953,63.65 v1(154.953,65.5) 155.65,65.5 156.15,66 156.15,68.9 158.075,70.825 U1C.18@159.425,70.825
  MidLayer1 w0.2: v1(89.75,36) 91.55,36 92.75,37.2 105.45,37.2 v1(106.75,38.5)
  Bottom Layer w0.2: v1(106.75,38.5) 108.153,38.5 119.353,49.7 123.884,49.7 128.784,54.6 141.584,54.6 144.75,57.766 v1(144.75,60.5) 147.25,63 147.25,67.9 147.65,68.3 152.153,68.3 v1(154.953,65.5)
SOFT_TDI: FPGA1C.H15 R2C.2 U1C.16 | length 93.3
  Top Layer w0.2: FPGA1C.H15@88.25,35.5 v1(88.75,36) ; v1(143.35,59.1) 144.15,58.3 148.75,58.3 151.35,60.9 151.35,63.3 151.629,63.579 R2C.2@152.547,63.579 ; R2C.2@152.547,63.65 153.497,62.7 156.65,62.7 156.95,63 156.95,68.5 157.975,69.525 U1C.16@159.425,69.525
  MidLayer1 w0.14: 89.25,36.5 90.25,36.5
  MidLayer1 w0.2: v1(88.75,36) 89.25,36.5 ; 90.25,36.5 91.45,36.5 92.55,37.6 104.95,37.6 106.45,39.1 108.719,39.1 118.519,48.9 125.484,48.9 130.784,54.2 141.784,54.2 143.35,55.766 v1(143.35,59.1)
SOFT_TDO: FPGA1C.H14 U1C.8 | length 84.5
  Top Layer w0.2: FPGA1C.H14@87.25,35.5 v1(87.75,36) ; U1C.8@152.875,67.575 v1(154.725,67.575)
  MidLayer2 w0.14: 88.25,35.5 90.116,35.5
  MidLayer2 w0.2: v1(87.75,36) 88.25,35.5 ; 90.116,35.5 90.816,35.5 92.316,37 104.35,37 104.85,37.5 107.75,37.5 118.75,48.5 118.784,48.5 119.184,48.9 125.484,48.9 130.384,53.8 139.584,53.8 144.05,58.266 144.05,60.7 150.925,67.575 v1(154.725,67.575)
SOFT_TMS: FPGA1C.J14 R1C.2 U1C.14 | length 91.3
  Top Layer w0.2: v1(86.75,35) FPGA1C.J14@87.25,34.5 ; R1C.2@150.147,63.65 150.147,64.197 150.65,64.7 v1@151.15,64.7 ; v1(157.575,68.225) U1C.14@159.425,68.225
  MidLayer1 w0.14: 87.25,35.5 90.25,35.5
  MidLayer1 w0.2: v1(86.75,35) 87.25,35.5 ; 90.25,35.5 91.65,35.5 92.95,36.8 105.85,36.8 107.723,38.673 108.857,38.673 118.684,48.5 125.65,48.5 130.95,53.8 141.95,53.8 144.95,56.8 144.95,59.7 149.95,64.7 155.25,64.7 157.575,67.025 v1(157.575,68.225)
  other v1: 151.35,64.7
SPKR_L: J6.5 J6.5A J6.5B LS2.1 | length 44.9
  MidLayer1 w0.6: J6.5@24.35,16.7 24.35,18.9 30.55,25.1 30.55,47.8 29.21,49.14 LS2.1@29.21,58.42 ; J6.5A@24.85,16.95 J6.5@24.9,16.95
SPKR_R: J6.3 J6.3A J6.3B LS1.1 | length 152.5
  MidLayer1 w0.6: J6.3@23.75,11.3 23.85,11.2 24.05,11 J6.3@24.85,11 ; J6.3@24.45,11.1 24.45,14.2 26.45,16.2 26.45,19.5 31.75,24.8 v3(31.75,52.9)
  MidLayer2 w0.5: v3(31.75,52.9) 46.75,52.9 49.85,56 71.55,56 74.85,59.3 92.85,59.3 95.95,56.2 117.95,56.2 120.17,58.42 LS1.1@133.35,58.42
SRAM0_A0: FPGA1C.G3 U5.5 | length 28.3
  Top Layer w0.2: v1(50.96,39.49) U5.5@52.21,39.49 ; v1(75.75,37) FPGA1C.G3@76.25,36.5
  MidLayer1 w0.2: v1(50.96,39.49) 54.36,39.49 55.95,37.9 65.85,37.9 66.398,37.352 67.35,36.4 74.584,36.4 75.184,37 v1(75.75,37)
SRAM0_A1: FPGA1C.G5 U5.4 | length 28
  Top Layer w0.2: U5.4@52.21,40.29 v1(53.46,40.29) ; v1(77.75,37) FPGA1C.G5@78.25,36.5
  MidLayer2 w0.14: 75.25,36.5 77.25,36.5
  MidLayer2 w0.2: v1(53.46,40.29) 57.25,36.5 75.25,36.5 ; 77.25,36.5 v1(77.75,37)
SRAM0_A2: FPGA1C.F4 U5.3 | length 27.9
  Top Layer w0.2: U5.3@52.21,41.09 v1@53.86,41.09 ; v1(76.75,38) FPGA1C.F4@77.25,37.5
  MidLayer1 w0.14: 75.25,37.5 76.25,37.5
  MidLayer1 w0.2: v1@53.86,41.09 v1@53.9,41.05 ; v1(53.95,41.1) 54.85,40.2 54.85,39.566 56.116,38.3 66.05,38.3 67.55,36.8 74.419,36.8 75.119,37.5 75.25,37.5 ; 76.25,37.5 v1(76.75,38)
SRAM0_A3: FPGA1C.F3 U5.2 | length 26.4
  Top Layer w0.2: U5.2@52.21,41.89 v1(53.44,41.89) ; v1(75.75,38) FPGA1C.F3@76.25,37.5
  MidLayer1 w0.2: v1(53.44,41.89) 54.36,41.89 55.35,40.9 55.35,40 56.65,38.7 66.25,38.7 66.95,38 v1(75.75,38)
SRAM0_A4: FPGA1C.F5 U5.1 | length 31.6
  Top Layer w0.2: v1(50.96,42.69) U5.1@52.21,42.69 ; v1(77.75,38) FPGA1C.F5@78.25,37.5
  MidLayer2 w0.14: 75.25,37.5 77.25,37.5
  MidLayer2 w0.2: v1(50.96,42.69) 53.46,42.69 59.25,36.9 74.65,36.9 75.25,37.5 ; 77.25,37.5 v1(77.75,38)
SRAM0_A5: FPGA1C.D1 U5.44 | length 12.5
  Top Layer w0.2: U5.44@63.36,42.69 64.26,42.69 64.85,42.1 71.05,42.1 71.55,41.6 71.55,41.031 72.981,39.6 73.76,39.6 73.86,39.5 FPGA1C.D1@74.25,39.5
SRAM0_A6: FPGA1C.E2 U5.43 | length 13.6
  Top Layer w0.2: U5.43@63.36,41.89 64.26,41.89 64.45,41.7 70.85,41.7 71.15,41.4 71.15,40.866 72.816,39.2 73.45,39.2 73.65,39 74.75,39 FPGA1C.E2@75.25,38.5
SRAM0_A7: FPGA1C.F2 U5.42 | length 13.9
  Top Layer w0.2: U5.42@63.36,41.09 64.16,41.09 65.05,40.2 71.25,40.2 71.656,39.794 71.656,38.891 72.547,38 74.75,38 FPGA1C.F2@75.25,37.5
SRAM0_A8: FPGA1C.M1 U5.27 | length 11.9
  Top Layer w0.2: U5.27@63.36,29.09 63.37,29.1 68.75,29.1 69.95,30.3 71.45,30.3 72.65,31.5 FPGA1C.M1@74.25,31.5
SRAM0_A9: FPGA1C.M2 U5.26 | length 13.2
  Top Layer w0.2: U5.26@63.36,28.29 68.94,28.29 70.205,29.555 70.55,29.9 71.65,29.9 72.75,31 74.75,31 FPGA1C.M2@75.25,31.5
SRAM0_A10: FPGA1C.N1 U5.25 | length 12.3
  Top Layer w0.2: U5.25@63.36,27.49 69.04,27.49 69.85,28.3 70.884,28.3 71.85,29.266 71.85,29.5 72.85,30.5 FPGA1C.N1@74.25,30.5
SRAM0_A11: FPGA1C.N2 U5.24 | length 13.7
  Top Layer w0.2: U5.24@63.36,26.69 66.574,26.69 66.784,26.9 69.016,26.9 70.016,27.9 71.05,27.9 72.25,29.1 72.25,29.3 73.05,30.1 73.582,30.1 73.682,30 74.75,30 FPGA1C.N2@75.25,30.5
SRAM0_A12: FPGA1C.P2 U5.23 | length 13.4
  Top Layer w0.2: U5.23@63.36,25.89 66.34,25.89 66.95,26.5 69.65,26.5 70.65,27.5 71.25,27.5 72.65,28.9 73.582,28.9 73.682,29 74.75,29 FPGA1C.P2@75.25,29.5
SRAM0_A13: FPGA1C.R3 U5.22 | length 26.4
  Top Layer w0.2: U5.22@52.22,25.9 v1(53.75,25.9) ; v1(75.75,29) FPGA1C.R3@76.25,28.5
  MidLayer1 w0.2: v1(53.75,25.9) 54.316,25.9 ; 54.316,26 55.316,27 69.65,27 70.35,26.3 71.35,26.3 71.95,26.9 71.95,27.5 72.95,28.5 74.25,28.5 74.75,29 v1(75.75,29)
SRAM0_A14: FPGA1C.P4 U5.21 | length 29.3
  Top Layer w0.2: v1(50.85,26.7) U5.21@52.2,26.7 ; v1(76.75,30) FPGA1C.P4@77.25,29.5
  MidLayer1 w0.14: 75.25,29.5 76.25,29.5
  MidLayer1 w0.2: v1(50.85,26.7) 54.45,26.7 55.15,27.4 71.25,27.4 72.75,28.9 74.05,28.9 74.65,29.5 75.25,29.5 ; 76.25,29.5 v1(76.75,30)
SRAM0_A15: FPGA1C.P3 U5.20 | length 25.6
  Top Layer w0.2: U5.20@52.22,27.5 v1(53.75,27.5) ; v1(75.75,30) FPGA1C.P3@76.25,29.5
  MidLayer1 w0.2: v1@53.65,27.5 53.95,27.8 71.084,27.8 72.75,29.466 72.75,29.7 73.15,30.1 74.116,30.1 74.216,30 v1(75.75,30)
SRAM0_A16: FPGA1C.P5 U5.19 | length 29.7
  Top Layer w0.2: v1(50.85,28.3) 50.86,28.29 U5.19@52.21,28.29 ; v1(77.75,30) FPGA1C.P5@78.25,29.5
  MidLayer2 w0.14: 75.25,29.5 77.25,29.5
  MidLayer2 w0.2: v1(50.85,28.3) 74.05,28.3 75.25,29.5 ; 77.25,29.5 v1(77.75,30)
SRAM0_A17: FPGA1C.N5 U5.18 | length 27.5
  Top Layer w0.2: U5.18@52.21,29.09 v1(53.74,29.09) ; v1(77.75,31) FPGA1C.N5@78.25,30.5
  MidLayer1 w0.14: 75.25,30.5 77.25,30.5
  MidLayer1 w0.2: v1(53.74,29.09) 54.13,28.7 71.25,28.7 72.35,29.8 72.35,30 72.85,30.5 75.25,30.5 ; 77.25,30.5 v1(77.75,31)
SRAM0_A18: FPGA1C.L2 U5.28 | length 13.2
  Top Layer w0.2: U5.28@63.36,29.89 65.26,29.89 65.55,29.6 68.65,29.6 70.65,31.6 72.184,31.6 72.584,32 74.75,32 FPGA1C.L2@75.25,32.5
SRAM0_D0: FPGA1C.H5 U5.7 | length 27.7
  Top Layer w0.2: U5.7@52.21,37.89 v1@53.36,37.89 ; v1(77.75,36) FPGA1C.H5@78.25,35.5
  MidLayer2 w0.2: v1@53.36,37.89 55.15,36.1 72.65,36.1 73.55,35.2 76.95,35.2 v1(77.75,36)
  other v1: 53.45,37.9
SRAM0_D1: FPGA1C.H3 U5.8 | length 27.6
  Top Layer w0.2: v1(50.95,37.1) 50.96,37.09 U5.8@52.21,37.09 ; v1(75.75,36) FPGA1C.H3@76.25,35.5
  MidLayer1 w0.2: v1(50.95,37.1) 65.45,37.1 66.95,35.6 75.35,35.6 v1(75.75,36)
SRAM0_D2: FPGA1C.H4 U5.9 | length 28.1
  Top Layer w0.2: U5.9@52.21,36.29 v1(53.44,36.29) ; v1(76.75,36) FPGA1C.H4@77.25,35.5
  MidLayer1 w0.2: v1@53.53,36.2 65.75,36.2 68.65,33.3 72.55,33.3 73.85,34.6 76.15,34.6 76.75,35.2 v1(76.75,36)
  MidLayer1 w0.3: v1(53.44,36.29) v1@53.53,36.2
SRAM0_D3: FPGA1C.N6 U5.10 | length 36.3
  Top Layer w0.2: v1@50.85,35.6 50.96,35.49 U5.10@52.21,35.49 ; v1(78.75,31) FPGA1C.N6@79.25,30.5
  MidLayer2 w0.14: 75.45,30.5 78.25,30.5
  MidLayer2 w0.2: v1@50.85,35.6 50.35,35.1 50.35,32.5 50.75,32.1 51.05,32.1 53.25,29.9 55.15,29.9 56.35,28.7 73.65,28.7 75.45,30.5 ; 78.25,30.5 v1(78.75,31)
  other v1: 50.85,35.7
SRAM0_D4: FPGA1C.M5 U5.13 | length 31.3
  Top Layer w0.2: v1(50.95,32.8) 51.24,33.09 U5.13@52.21,33.09 ; v1(77.75,32) FPGA1C.M5@78.25,31.5
  MidLayer2 w0.14: 75.25,31.5 77.25,31.5
  MidLayer2 w0.2: v1(50.95,32.8) 52.25,31.5 54.15,31.5 56.15,29.5 69.45,29.5 70.25,30.3 71.45,30.3 72.65,31.5 75.25,31.5 ; 77.25,31.5 v1(77.75,32)
SRAM0_D5: FPGA1C.M4 U5.14 | length 26.9
  Top Layer w0.2: U5.14@52.21,32.29 52.22,32.3 v1(53.75,32.3) ; v1(76.75,32) FPGA1C.M4@77.25,31.5
  MidLayer1 w0.14: 75.25,32.5 76.25,32.5
  MidLayer1 w0.2: v1(53.75,32.3) 53.916,32.3 55.516,30.7 66.15,30.7 66.75,31.3 69.65,31.3 70.307,31.957 70.45,32.1 74.35,32.1 74.55,32.3 74.75,32.5 75.25,32.5 ; 76.25,32.5 v1(76.75,32)
SRAM0_D6: FPGA1C.M3 U5.15 | length 28.2
  Top Layer w0.2: v1@50.86,31.49 v1(50.85,31.5) U5.15@52.2,31.5 ; v1(75.75,32) FPGA1C.M3@76.25,31.5
  MidLayer1 w0.2: v1(50.85,31.5) 54.15,31.5 55.35,30.3 66.35,30.3 66.95,30.9 70.05,30.9 70.85,31.7 74.65,31.7 74.95,32 v1(75.75,32)
SRAM0_D7: FPGA1C.N4 U5.16 | length 26.8
  Top Layer w0.2: U5.16@52.21,30.69 v1@53.74,30.69 ; v1(76.75,31) FPGA1C.N4@77.25,30.5
  MidLayer1 w0.14: 75.25,31.5 76.25,31.5
  MidLayer1 w0.2: v1(53.75,30.7) 54.95,29.5 69.55,29.5 70.35,30.3 71.45,30.3 72.45,31.3 75.05,31.3 75.25,31.5 ; 76.25,31.5 v1(76.75,31)
SRAM0_D8: FPGA1C.L3 U5.29 | length 14.1
  Top Layer w0.2: U5.29@63.36,30.69 66.84,30.69 67.05,30.9 68.75,30.9 70.25,32.4 71.85,32.4 72.35,32.9 73.782,32.9 73.882,33 75.75,33 FPGA1C.L3@76.25,32.5
SRAM0_D9: FPGA1C.L4 U5.30 | length 14.7
  Top Layer w0.2: U5.30@63.36,31.49 64.74,31.49 v1(64.75,31.5) ; v1(76.75,33) FPGA1C.L4@77.25,32.5
  MidLayer1 w0.2: v1(64.75,31.5) 65.75,32.5 74.184,32.5 74.684,33 v1(76.75,33)
SRAM0_D10: FPGA1C.L5 U5.31 | length 18.2
  Top Layer w0.2: v1(61.95,32.3) U5.31@63.35,32.3 ; v1(77.75,33) FPGA1C.L5@78.25,32.5
  MidLayer2 w0.14: 75.25,32.5 77.25,32.5
  MidLayer2 w0.2: v1(61.95,32.3) 62.15,32.5 75.25,32.5 ; 77.25,32.5 v1(77.75,33)
SRAM0_D11: FPGA1C.K5 U5.32 | length 16.8
  Top Layer w0.2: U5.32@63.36,33.09 63.37,33.1 v1(64.75,33.1) ; FPGA1C.K5@78.25,33.5 v1(78.75,33)
  MidLayer2 w0.14: 75.25,33.5 78.25,33.5 v1(78.75,33)
  MidLayer2 w0.2: v1@64.65,33.2 64.95,32.9 73.75,32.9 73.85,33 74.75,33 75.25,33.5
SRAM0_D12: FPGA1C.K4 U5.35 | length 15.6
  Top Layer w0.2: U5.35@63.37,35.5 v1(64.65,35.5) ; v1(76.75,34) FPGA1C.K4@77.25,33.5
  MidLayer1 w0.14: 75.25,33.5 76.25,33.5
  MidLayer1 w0.2: v1(64.65,35.5) 65.85,35.5 68.45,32.9 73.75,32.9 74.35,33.5 75.25,33.5 ; 76.25,33.5 v1(76.75,34)
SRAM0_D13: FPGA1C.H6 U5.36 | length 16.6
  Top Layer w0.2: U5.36@63.36,36.29 67.76,36.29 68.05,36 71.119,36 72.119,35 78.75,35 FPGA1C.H6@79.25,35.5
SRAM0_D14: FPGA1C.H1 U5.37 | length 11.5
  Top Layer w0.2: U5.37@63.36,37.09 64.26,37.09 64.66,36.69 67.96,36.69 68.25,36.4 71.284,36.4 72.084,35.6 73.25,35.6 73.35,35.5 FPGA1C.H1@74.25,35.5
SRAM0_D15: FPGA1C.H2 U5.38 | length 12.9
  Top Layer w0.2: U5.38@63.36,37.89 64.06,37.89 64.86,37.09 68.16,37.09 68.45,36.8 71.45,36.8 72.15,36.1 73.35,36.1 73.45,36 74.75,36 FPGA1C.H2@75.25,35.5
SRAM0_E: FPGA1C.G4 U5.6 | length 27
  Top Layer w0.2: U5.6@52.21,38.69 v1(53.96,38.69) ; v1@76.896,36.854 v1(76.75,37) FPGA1C.G4@77.25,36.5
  MidLayer1 w0.14: 75.25,36.5 76.25,36.5
  MidLayer1 w0.2: v1(53.96,38.69) 55.15,37.5 65.65,37.5 66.084,37.066 67.15,36 74.75,36 75.25,36.5 ; 76.25,36.5 v1(76.75,37)
SRAM0_LB: FPGA1C.G1 U5.39 | length 11.8
  Top Layer w0.2: U5.39@63.36,38.69 64.06,38.69 64.65,38.1 70.75,38.1 72.25,36.6 73.76,36.6 73.86,36.5 FPGA1C.G1@74.25,36.5
SRAM0_OE: FPGA1C.F1 U5.41 | length 12.6
  Top Layer w0.2: U5.41@63.36,40.29 64.16,40.29 64.65,39.8 71.05,39.8 71.256,39.594 71.256,38.726 72.481,37.5 FPGA1C.F1@74.25,37.5
SRAM0_UB: FPGA1C.G2 U5.40 | length 13.1
  Top Layer w0.2: U5.40@63.36,39.49 63.96,39.49 64.95,38.5 70.916,38.5 72.416,37 74.75,37 FPGA1C.G2@75.25,36.5
SRAM0_WE: FPGA1C.N3 U5.17 | length 28.1
  Top Layer w0.2: v1@50.86,29.89 v1(50.85,29.9) U5.17@52.2,29.9 ; v1(75.75,31) FPGA1C.N3@76.25,30.5
  MidLayer1 w0.2: v1(50.85,29.9) 53.75,29.9 54.55,29.1 69.75,29.1 70.55,29.9 71.616,29.9 72.616,30.9 75.65,30.9 v1(75.75,31)
SRAM1_A0: FPGA1C.G18 U6.5 | length 11.5
  Top Layer w0.2: FPGA1C.G18@91.25,36.5 92.119,36.5 92.619,37 93.447,37 94.447,38 99.25,38 100.65,39.4 U6.5@101.575,39.4
SRAM1_A1: FPGA1C.G17 U6.4 | length 12.9
  Top Layer w0.2: FPGA1C.G17@90.25,36.5 90.75,37 92.05,37 92.214,37.164 92.45,37.4 93.281,37.4 94.281,38.4 98.75,38.4 100.55,40.2 U6.4@101.575,40.2
SRAM1_A2: FPGA1C.F18 U6.3 | length 11.8
  Top Layer w0.2: FPGA1C.F18@91.25,37.5 91.95,37.5 92.25,37.8 93.116,37.8 94.116,38.8 98.35,38.8 100.55,41 U6.3@101.575,41
SRAM1_A3: FPGA1C.F17 U6.2 | length 13.1
  Top Layer w0.2: FPGA1C.F17@90.25,37.5 90.75,38 91.884,38 92.084,38.2 92.95,38.2 93.95,39.2 98.05,39.2 100.65,41.8 U6.2@101.575,41.8
SRAM1_A4: FPGA1C.E17 U6.1 | length 13
  Top Layer w0.2: FPGA1C.E17@90.25,38.5 90.75,39 91.85,39 92.45,39.6 97.55,39.6 100.55,42.6 U6.1@101.575,42.6
SRAM1_A5: FPGA1C.L14 U6.44 | length 35.4
  Top Layer w0.2: FPGA1C.L14@87.25,32.5 v1(87.75,33) ; U6.44@112.725,42.6 112.825,42.7 v1(115.05,42.7)
  MidLayer2 w0.14: 88.25,33.5 90.25,33.5
  MidLayer2 w0.2: v1(87.75,33) 88.25,33.5 ; 90.25,33.5 91.45,32.3 103.85,32.3 113.572,42.022 113.572,42.122 114.15,42.7 v1(115.05,42.7)
SRAM1_A6: FPGA1C.L16 U6.43 | length 30
  Top Layer w0.2: FPGA1C.L16@89.25,32.5 v1(89.75,33) ; U6.43@112.725,41.8 v1(114.05,41.8)
  MidLayer1 w0.2: v1(89.75,33) 93.753,33 93.853,33.1 103.85,33.1 112.55,41.8 v1(114.05,41.8)
SRAM1_A7: FPGA1C.L15 U6.42 | length 31.9
  Top Layer w0.2: FPGA1C.L15@88.25,32.5 v1(88.75,33) ; U6.42@112.725,41 v1@114.45,41
  MidLayer1 w0.14: 89.25,32.5 90.25,32.5
  MidLayer1 w0.2: v1(88.75,33) 89.25,32.5 ; 90.25,32.5 93.819,32.5 94.019,32.7 104.05,32.7 112.35,41 v1@114.45,41
  other v1: 114.55,41
SRAM1_A8: FPGA1C.P14 U6.27 | length 26.6
  Top Layer w0.2: FPGA1C.P14@87.25,29.5 v1(87.75,30) ; v1(108.55,29) U6.27@112.65,29
  MidLayer1 w0.2: v1(87.75,30) 89.4,28.35 93.8,28.35 93.95,28.5 108.05,28.5 v1(108.55,29)
SRAM1_A9: FPGA1C.T17 U6.26 | length 31.9
  Top Layer w0.2: v1(89.75,27) FPGA1C.T17@90.25,27.5 ; U6.26@112.725,28.2 v1@114.048,28.2
  MidLayer1 w0.2: v1(89.75,27) 89.75,25.2 90.15,24.8 90.15,23.7 90.95,22.9 93.55,22.9 97.45,26.8 109.45,26.8 110.849,28.199 v1(114.049,28.199)
SRAM1_A10: FPGA1C.R15 U6.25 | length 31.9
  Top Layer w0.2: v1(87.75,28) FPGA1C.R15@88.25,28.5 ; v1(111.15,27.4) U6.25@112.725,27.4
  MidLayer1 w0.2: v1(87.75,28) 88.75,27 88.75,23.8 90.05,22.5 93.85,22.5 97.75,26.4 109.75,26.4 110.75,27.4 v1(111.15,27.4)
SRAM1_A11: FPGA1C.T15 U6.24 | length 34.1
  Top Layer w0.2: v1(87.75,27) FPGA1C.T15@88.25,27.5 ; U6.24@112.725,26.6 v1@114.15,26.6
  MidLayer1 w0.2: v1(87.75,27) 88.25,26.5 88.25,23.7 89.85,22.1 94.05,22.1 97.95,26 109.95,26 110.55,26.6 v1@114.15,26.6
  other v1: 114.05,26.6
SRAM1_A12: FPGA1C.R14 U6.23 | length 33
  Top Layer w0.2: v1(86.75,28) FPGA1C.R14@87.25,28.5 ; v1(111.15,25.8) U6.23@112.725,25.8
  MidLayer1 w0.14: 87.25,26.5 87.25,27.5
  MidLayer1 w0.2: v1(86.75,28) 87.25,27.5 ; 87.25,26.5 87.75,26 87.75,25 87.85,24.9 87.85,23.5 89.65,21.7 94.25,21.7 98.15,25.6 110.55,25.6 110.75,25.8 v1(111.15,25.8)
SRAM1_A13: FPGA1C.U15 U6.22 | length 18.8
  Top Layer w0.2: FPGA1C.U15@88.25,26.5 87.75,26 87.75,25.032 87.85,24.932 87.85,24.1 89.95,22 93.85,22 95.05,23.2 96.813,23.2 99.413,25.8 U6.22@101.575,25.8
SRAM1_A14: FPGA1C.V15 U6.21 | length 17.1
  Top Layer w0.2: FPGA1C.V15@88.25,25.5 88.25,24.3 88.284,24.3 90.184,22.4 93.65,22.4 94.85,23.6 96.647,23.6 99.647,26.6 U6.21@101.575,26.6
SRAM1_A15: FPGA1C.T16 U6.20 | length 18.7
  Top Layer w0.2: FPGA1C.T16@89.25,27.5 88.75,27 88.75,24.4 90.35,22.8 93.45,22.8 94.65,24 96.481,24 99.881,27.4 U6.20@101.575,27.4
SRAM1_A16: FPGA1C.U16 U6.19 | length 15.3
  Top Layer w0.2: FPGA1C.U16@89.25,26.5 89.75,26 89.75,25.2 90.15,24.8 90.15,24.7 90.45,24.4 96.316,24.4 100.116,28.2 U6.19@101.575,28.2
SRAM1_A17: FPGA1C.R18 U6.18 | length 11.8
  Top Layer w0.2: FPGA1C.R18@91.25,28.5 91.65,28.1 92.95,28.1 94.05,27 98.35,27 100.35,29 U6.18@101.575,29
SRAM1_A18: FPGA1C.R16 U6.28 | length 24.2
  Top Layer w0.2: FPGA1C.R16@89.25,28.5 v1(89.75,29) ; v1(109.35,29.8) U6.28@112.725,29.8
  MidLayer1 w0.2: v1(89.75,29) 90,28.75 93.634,28.75 93.784,28.9 107.45,28.9 108.35,29.8 v1(109.35,29.8)
SRAM1_D0: FPGA1C.H18 U6.7 | length 11.4
  Top Layer w0.2: FPGA1C.H18@91.25,35.5 92.518,35.5 93.218,36.2 93.778,36.2 94.778,37.2 99.716,37.2 100.316,37.8 U6.7@101.575,37.8 U6.7@101.65,37.8
SRAM1_D1: FPGA1C.L17 U6.8 | length 15.4
  Top Layer w0.2: FPGA1C.L17@90.25,32.5 90.75,33 93.15,33 93.85,32.3 96.15,32.3 96.45,32.6 96.45,35.3 97.95,36.8 99.881,36.8 100.081,37 U6.8@101.575,37
SRAM1_D2: FPGA1C.L18 U6.9 | length 13.8
  Top Layer w0.2: FPGA1C.L18@91.25,32.5 93.05,32.5 93.65,31.9 98.687,31.9 99.35,32.563 99.35,35.1 100.45,36.2 U6.9@101.575,36.2
SRAM1_D3: FPGA1C.M17 U6.10 | length 15.6
  Top Layer w0.2: FPGA1C.M17@90.25,31.5 90.75,32 92.85,32 94.25,30.6 97.953,30.6 98.887,31.534 99.75,32.397 99.75,34.934 100.216,35.4 U6.10@101.575,35.4
SRAM1_D4: FPGA1C.M18 U6.13 | length 12.3
  Top Layer w0.2: FPGA1C.M18@91.25,31.5 92.75,31.5 94.05,30.2 98.119,30.2 99.836,31.917 100.15,32.231 ; 100.15,32.3 100.15,32.9 100.25,33 U6.13@101.575,33
SRAM1_D5: FPGA1C.N17 U6.14 | length 14.2
  Top Layer w0.2: FPGA1C.N17@90.25,30.5 90.75,31 92.65,31 93.35,30.3 93.35,30.266 95.016,28.6 97.419,28.6 97.949,29.13 97.949,29.465 100.684,32.2 U6.14@101.575,32.2
SRAM1_D6: FPGA1C.N18 U6.15 | length 12.9
  Top Layer w0.2: FPGA1C.N18@91.25,30.5 91.653,30.5 91.753,30.6 92.45,30.6 94.05,29 94.05,28.966 94.816,28.2 97.584,28.2 98.349,28.965 98.349,29.299 100.45,31.4 U6.15@101.575,31.4
SRAM1_D7: FPGA1C.P17 U6.16 | length 13.8
  Top Layer w0.2: FPGA1C.P17@90.25,29.5 90.75,30 91.718,30 91.918,30.2 92.25,30.2 94.65,27.8 97.75,27.8 100.55,30.6 U6.16@101.575,30.6
SRAM1_D8: FPGA1C.P15 U6.29 | length 26
  Top Layer w0.2: FPGA1C.P15@88.25,29.5 v1(88.75,30) ; v1(111.15,30.6) U6.29@112.725,30.6
  MidLayer1 w0.14: 89.25,29.5 90.25,29.5
  MidLayer1 w0.2: v1(88.75,30) 89.25,29.5 ; 90.25,29.5 91.25,29.5 91.85,30.1 92.35,30.1 93.15,29.3 95.95,29.3 96.75,30.1 104.913,30.1 105.413,30.6 v1(111.15,30.6)
SRAM1_D9: FPGA1C.P16 U6.30 | length 24.9
  Top Layer w0.2: FPGA1C.P16@89.25,29.5 v1(89.75,30) ; v1(110.45,31.4) U6.30@112.725,31.4
  MidLayer1 w0.2: v1(89.75,30) 91.184,30 91.684,30.5 92.55,30.5 93.35,29.7 95.784,29.7 96.584,30.5 104.747,30.5 105.647,31.4 v1(110.45,31.4)
SRAM1_D10: FPGA1C.N15 U6.31 | length 26.2
  Top Layer w0.2: FPGA1C.N15@88.25,30.5 v1(88.75,31) ; v1(111.15,32.2) U6.31@112.725,32.2
  MidLayer1 w0.14: 89.25,30.5 90.25,30.5
  MidLayer1 w0.2: v1(88.75,31) 89.25,30.5 ; 90.25,30.5 91.119,30.5 91.519,30.9 92.75,30.9 93.55,30.1 95.619,30.1 96.419,30.9 104.581,30.9 105.881,32.2 108.75,32.2 ; 108.784,32.166 108.819,32.2 v1(111.15,32.2)
SRAM1_D11: FPGA1C.N16 U6.32 | length 25.3
  Top Layer w0.2: FPGA1C.N16@89.25,30.5 v1(89.75,31) ; v1(109.05,33) U6.32@112.725,33 U6.32@112.85,33
  MidLayer1 w0.2: v1(89.75,31) 91.053,31 91.353,31.3 92.95,31.3 93.75,30.5 95.453,30.5 96.253,31.3 104.416,31.3 106.116,33 v1(109.05,33)
SRAM1_D12: FPGA1C.N13 U6.35 | length 30.5
  Top Layer w0.2: FPGA1C.N13@86.25,30.5 v1(86.75,30) ; v1(109.05,34.1) 110.35,35.4 110.55,35.4 U6.35@112.725,35.4
  MidLayer2 w0.14: v1(86.75,30) 86.75,29.665 87.285,29.129 88.421,29.129 89.25,28.3
  MidLayer2 w0.2: 89.25,28.3 102.678,28.3 108.278,33.9 108.478,34.1 v1(109.05,34.1)
SRAM1_D13: FPGA1C.N12 U6.36 | length 32.1
  Top Layer w0.2: FPGA1C.N12@85.25,30.5 v1(85.75,31) ; v1(111.15,36.175) U6.36@112.7,36.175
  MidLayer2 w0.14: 86.25,30.5 87,30.5 87.25,30.25 87.25,29.646 87.396,29.5 90.25,29.5
  MidLayer2 w0.2: v1(85.75,31) 86.25,30.5 ; 90.25,29.5 91.05,28.7 102.513,28.7 109.988,36.175 v1(111.15,36.175)
SRAM1_D14: FPGA1C.N14 U6.37 | length 31.6
  Top Layer w0.2: FPGA1C.N14@87.25,30.5 v1(87.75,31) ; U6.37@112.725,37 v1(114.05,37)
  MidLayer2 w0.14: 88.25,30.5 90.25,30.5
  MidLayer2 w0.2: v1(87.75,31) 88.25,30.5 ; 90.25,30.5 90.65,30.1 103.347,30.1 110.247,37 v1(114.05,37)
SRAM1_D15: FPGA1C.M13 U6.38 | length 30.4
  Top Layer w0.2: FPGA1C.M13@86.25,31.5 v1(86.75,31) ; v1(111.15,37.8) U6.38@112.75,37.8
  MidLayer2 w0.14: 87.25,31.5 90.25,31.5
  MidLayer2 w0.2: v1(86.75,31) 87.25,31.5 ; 90.25,31.5 91.25,30.5 103.181,30.5 110.481,37.8 v1(111.15,37.8)
  other v1: 86.75,31
SRAM1_E: FPGA1C.H17 U6.6 | length 12.7
  Top Layer w0.2: FPGA1C.H17@90.25,35.5 90.75,36 92.453,36 93.053,36.6 93.613,36.6 94.613,37.6 99.55,37.6 100.55,38.6 U6.6@101.575,38.6 U6.6@101.65,38.6
SRAM1_LB: FPGA1C.M15 U6.39 | length 30.5
  Top Layer w0.2: FPGA1C.M15@88.25,31.5 v1(88.75,32) ; U6.39@112.725,38.6 v1(114.05,38.6)
  MidLayer1 w0.14: 89.25,31.5 90.25,31.5
  MidLayer1 w0.2: v1(88.75,32) 89.25,31.5 ; 90.25,31.5 90.987,31.5 91.187,31.7 94.15,31.7 94.35,31.9 104.45,31.9 111.15,38.6 v1(114.05,38.6)
SRAM1_OE: FPGA1C.M14 U6.41 | length 32.4
  Top Layer w0.2: FPGA1C.M14@87.25,31.5 v1(87.75,32) ; U6.41@112.725,40.2 v1@114.15,40.2
  MidLayer2 w0.14: 88.25,32.5 90.25,32.5
  MidLayer2 w0.2: v1(87.75,32) 88.25,32.5 ; 90.25,32.5 90.85,31.9 104.016,31.9 112.316,40.2 v1@114.15,40.2
  other v1: 114.05,40.2
SRAM1_UB: FPGA1C.M16 U6.40 | length 30.2
  Top Layer w0.2: FPGA1C.M16@89.25,31.5 v1(89.75,32) ; U6.40@112.725,39.4 v1@114.45,39.4
  MidLayer1 w0.2: v1(89.75,32) 90.922,32 91.022,32.1 93.984,32.1 94.184,32.3 104.25,32.3 111.35,39.4 v1@114.45,39.4
  other v1: 114.55,39.4
SRAM1_WE: FPGA1C.R17 U6.17 | length 13.2
  Top Layer w0.2: FPGA1C.R17@90.25,28.5 90.75,29 91.718,29 92.218,28.5 93.15,28.5 94.25,27.4 98.15,27.4 100.55,29.8 U6.17@101.575,29.8
SW_DIP0: FPGA1C.R4 R11.1 S1.1 | length 48.5
  Top Layer w0.2: v1(76.75,29) FPGA1C.R4@77.25,28.5
  MidLayer1 w0.14: 75.25,28.5 76.25,28.5
  MidLayer1 w0.2: S1.1@49.53,4 49.53,5.68 51.152,7.302 57.55,7.302 60.95,10.702 60.95,12 61.85,12.9 63.75,12.9 64.35,13.5 66.85,13.5 67.25,13.9 67.25,20.4 72.35,25.5 72.35,27.3 73.15,28.1 74.45,28.1 74.85,28.5 75.25,28.5 ; 76.25,28.5 v1(76.75,29)
  Bottom Layer w0.3: R11.1@46.55,2.45 47.98,2.45 S1.1@49.53,4
SW_DIP1: FPGA1C.T3 R12.1 S1.2 | length 44.4
  Top Layer w0.2: v1(75.75,28) FPGA1C.T3@76.25,27.5
  MidLayer1 w0.2: S1.2@52.07,4 52.07,5.02 53.952,6.902 57.716,6.902 61.113,10.3 62.45,10.3 63.45,11.3 63.45,11.9 64.65,13.1 67.184,13.1 67.65,13.566 67.65,20.2 67.878,20.428 72.75,25.3 72.75,25.6 75.15,28 v1(75.75,28)
  Bottom Layer w0.2: R12.1@48.95,7.75 48.95,7.12 S1.2@52.07,4
SW_DIP2: FPGA1C.T4 R13.1 S1.3 | length 42.2
  Top Layer w0.2: v1(76.75,28) FPGA1C.T4@77.25,27.5
  MidLayer1 w0.14: 75.25,27.5 76.25,27.5
  MidLayer1 w0.2: S1.3@54.61,4 54.61,4.96 56.152,6.502 57.952,6.502 61.35,9.9 62.616,9.9 63.216,10.5 65.35,10.5 66.05,11.2 66.05,12 66.75,12.7 67.35,12.7 68.05,13.4 68.05,20.034 73.15,25.134 73.15,25.4 75.25,27.5 ; 76.25,27.5 v1(76.75,28)
  Bottom Layer w0.3: R13.1@52.07,6.67 53.08,6.67 54.61,5.14 S1.3@54.61,4
SW_DIP3: FPGA1C.T5 R14.1 S1.4 | length 44.3
  Top Layer w0.2: v1(77.75,27) FPGA1C.T5@78.25,27.5
  MidLayer1 w0.2: S1.4@57.15,4 57.15,5.298 57.954,6.102 67.455,6.102 68.45,7.098 68.45,19.869 71.581,23 75.45,23 76.85,24.4 76.85,26.1 v1(77.75,27)
  Bottom Layer w0.3: R14.1@55.88,7.305 56.545,7.305 57.15,6.7 S1.4@57.15,4
SW_DIP4: FPGA1C.R6 R15.1 S1.5 | length 41.8
  Top Layer w0.2: v1(78.75,28) FPGA1C.R6@79.25,28.5
  MidLayer1 w0.14: 78.25,26.5 78.25,27.5
  MidLayer1 w0.2: S1.5@59.69,4 59.69,4.739 60.653,5.702 67.62,5.702 68.85,6.932 68.85,19.703 71.747,22.6 75.65,22.6 77.25,24.2 77.25,25.5 78.25,26.5 ; 78.25,27.5 v1(78.75,28)
  Bottom Layer w0.3: S1.5@59.69,3.86 R15.1@59.69,6.67
SW_DIP5: FPGA1C.P7 R16.1 S1.6 | length 40.2
  Top Layer w0.2: v1(79.75,29) FPGA1C.P7@80.25,29.5
  MidLayer2 w0.14: 79.25,26.5 79.25,28.5
  MidLayer2 w0.2: S1.6@62.15,3.9 68.45,10.2 68.45,20.1 69.65,21.3 73.95,21.3 74.35,21.7 75.65,23 79.15,26.5 79.25,26.5 ; 79.25,28.5 v1(79.75,29)
  Bottom Layer w0.3: S1.6@62.23,4 62.23,7.18 62.355,7.305 R16.1@63.5,7.305